# Altium PCB USBtoCANF3.PcbDoc
Units mil, origin at the board's own origin, x right, y up, seen from the top; angles counter-clockwise.
Board outline 1835 x 2600 mil, 2 copper layers (Top Layer, Bottom Layer); 28 components, 94 nets, 194 pads, 20 vias.
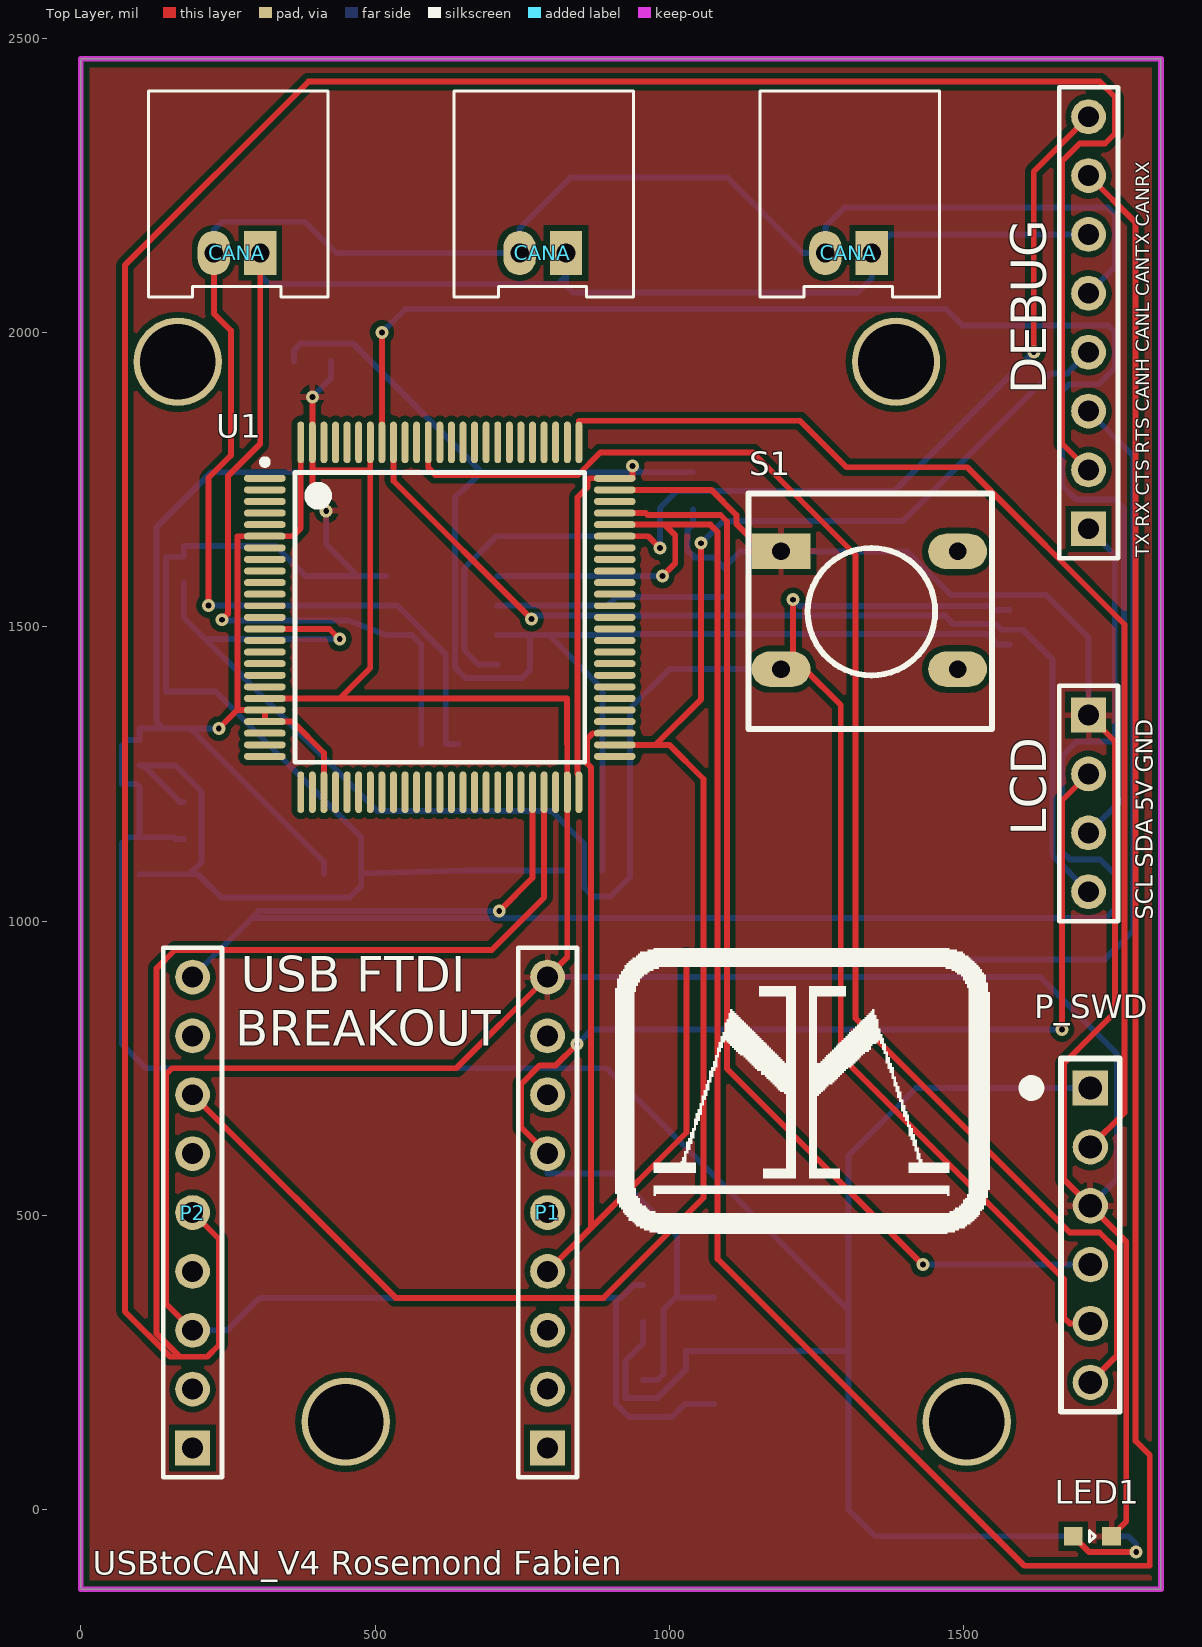
[diagram p0: Top Layer view]
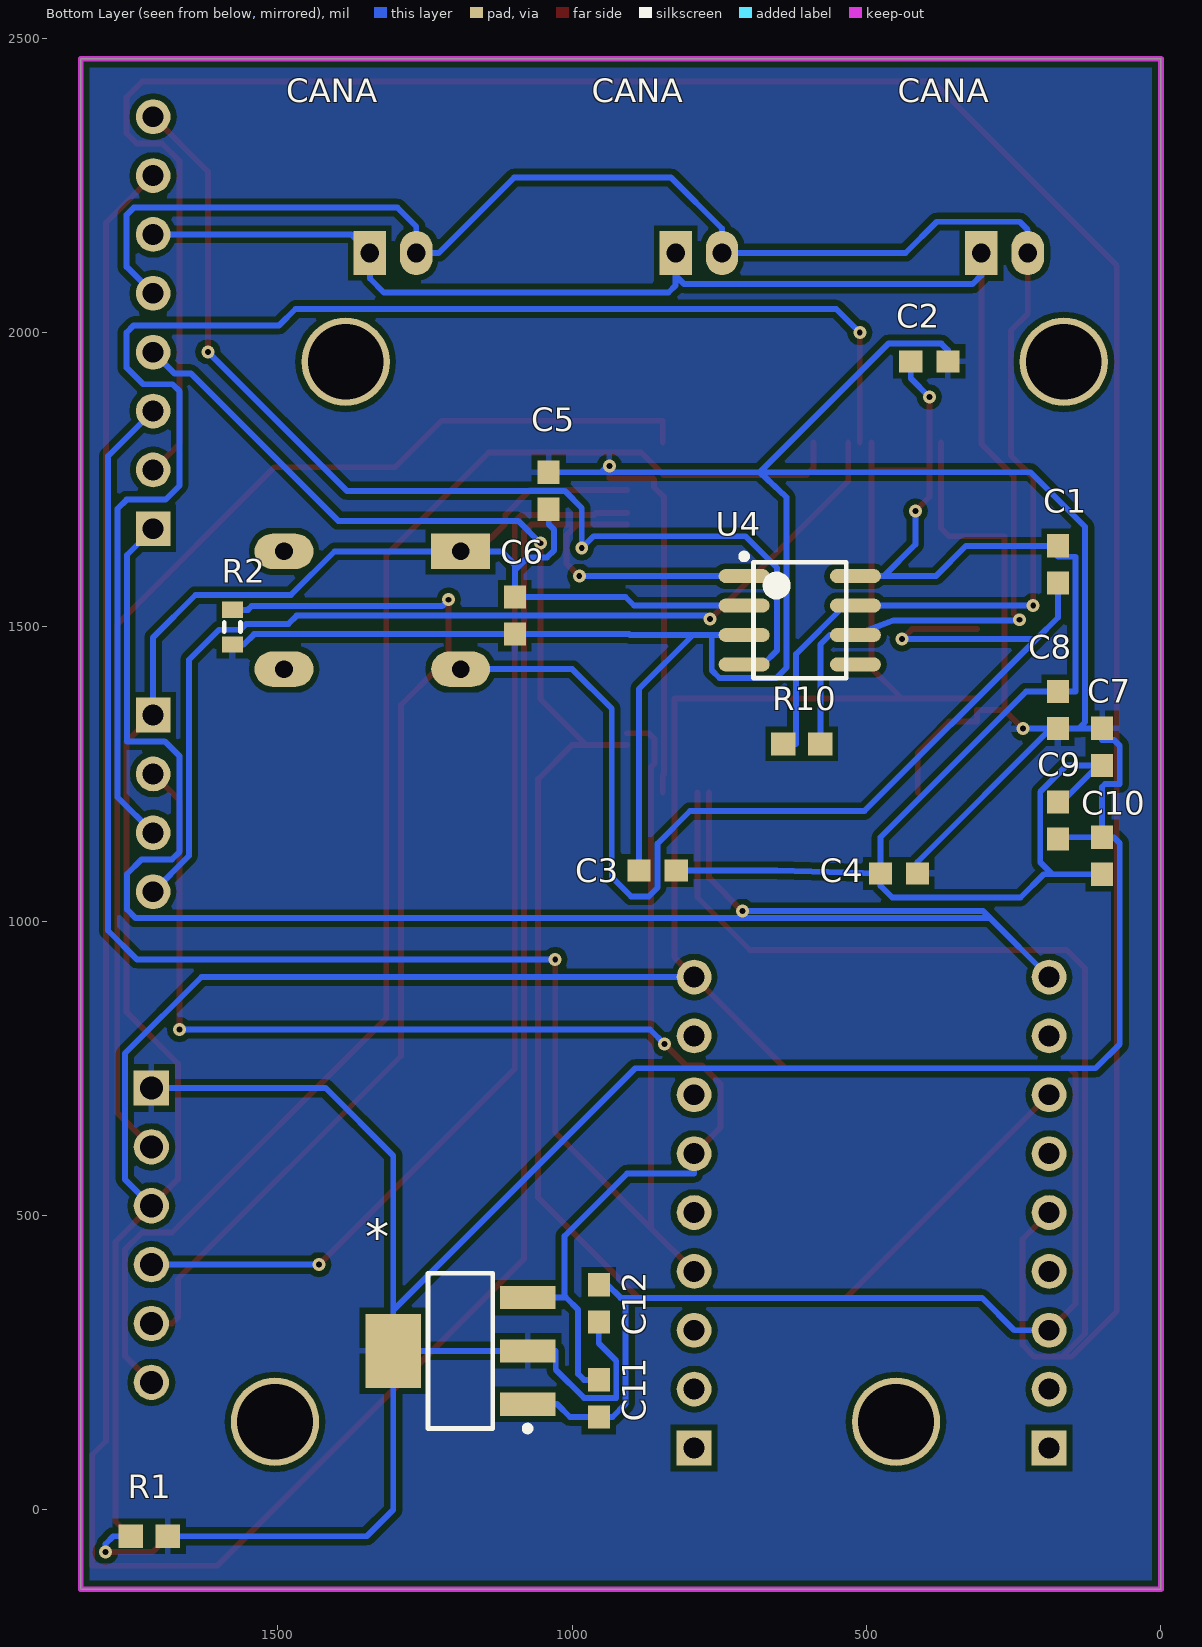
[diagram p1: Bottom Layer view, seen from below]

## Layer stack, top to bottom
Top Solder: solder mask 0.4, Solder Resist, Dk 3.5
Top Layer: signal copper 1.4
Dielectric 1: dielectric 12.6, FR-4, Dk 4.8
Bottom Layer: signal copper 1.4
Bottom Solder: solder mask 0.4, Solder Resist, Dk 3.5

## Board outline
0,-135 1835,-135 1835,2465 0,2465

## Design rules (kind name [scope] priority, off if disabled: settings)
Clearance [All] p1: gap=10 ignorepadtopadclearanceinfootprint=TRUE except(0: Arc-Hole Track-Hole SMDPad-Hole THPad-Hole Via-Hole Fill-Hole Poly-Hole Region-Hole Text-Hole; 6: Track-Track Track-SMDPad SMDPad-SMDPad; 7: Track-Via)
HoleSize [All] p1: absolutevalues=TRUE maxlimit=150 minlimit=10 maxpercent=80.000 minpercent=20.000
MinimumAnnularRing [All] p1: minimumring=7
MinimumSolderMaskSliver [All] p1: minsoldermaskwidth=1
PolygonConnect [All] p1: connectstyle=Relief reliefconductorwidth=10 reliefentries=4 polygonreliefangle="90 Angle" airgapwidth=10
RoutingVias [All] p1: holewidth=10 width=22 viastyle="Through Hole" minholewidth=10 minwidth=22 maxholewidth=100 maxwidth=150
SilkToSolderMaskClearance [IsPad] p1: minsilkscreentomaskgap=5 clearancetoexposedcopper=TRUE
SolderMaskExpansion [All] p1: expansion=4
Width [All] p1: maxlimit=150 minlimit=8 preferedwidth=10
27 further rules are at their usual default settings.

## Components (designator, comment, footprint, x,y, rotation, side; value= is the part's Value field where it differs from the comment)
* "TLV1117LV33DCYR" SOT23-4N 1190,270 r0 bottom
C1 "Cap" CAPC0603 175,1606.06 r90 bottom value=100nF
C2 "Cap" CAPC0603 393.46,1951.06 r0 bottom value=4.7uF
C3 "Cap" CAPC0603 855,1086.06 r180 bottom value=100nF
C4 "Cap" CAPC0603 445,1081.06 r0 bottom value=100nF
C5 "Cap" CAPC0603 1040,1731.06 r270 bottom value=100nF
C6 "Cap" CAPC0603 1097.48,1519.02 r90 bottom value=100nF
C7 "Cap" CAPC0603 100,1296.06 r270 bottom value=1uF
C8 "Cap" CAPC0603 175,1358.58 r90 bottom value=10nF
C9 "Cap" CAPC0603 175,1171.06 r90 bottom value=1uF
C10 "Cap" CAPC0603 100,1111.06 r270 bottom value=10nF
C11 "Cap" CAPC0603 955,189.29 r270 bottom value=1uF
C12 "Cap" CAPC0603 955,350.71 r90 bottom value=1uF
CANA "2-pin Horz Sherlock" MOLEX-HDR-1X2-SHERLOCK-HORZ 824.37,2135 r0 top
CANA "2-pin Horz Sherlock" MOLEX-HDR-1X2-SHERLOCK-HORZ 1343.74,2135 r0 top
CANA "2-pin Horz Sherlock" MOLEX-HDR-1X2-SHERLOCK-HORZ 305,2135 r0 top
LED1 "LED" LED0603 1718.5,-45 r0 top
P1 "Header 9" HDR1X9 793,105 r90 top
P2 "Header 9" HDR1X9 190,105 r90 top locked
P_SWD "SWD" SWD_STM32 1715,716.5 r0 top (schematic designator P_SWD1)
R1 "Res" RES0603 1718.5,-45 r0 bottom value=1k
R2 "Res3" J1-0603 1577.48,1499.33 r90 bottom value=1K
R10 "Res" RES0603 610,1301.06 r0 bottom value=120
S1 "SW-PB" "SW PB" 1189.64,1628.07 r0 top
"SCL SDA 5V GND" "LCD" HDR1X4 1712.01,1350 r270 top (schematic designator P4)
"TX RX CTS RTS CANH CANL CANTX CANRX" "Header 8" HDR1X8 1712.01,1666.5 r90 top (schematic designator P3)
U1 "STM32F303VCT6" STM-LQFP100_N 610,1516.06 r0 top
U4 "SN65HVD230DR" SOIC-8pin 613.5,1511.06 r180 bottom

## Footprints (in the part's own frame and the unit in brackets; to place one, negate y for a bottom-side part, rotate by r counter-clockwise, add the part's x,y. Pads: shape width x height; smd on the part's side, far side on the other; paste and mask are expansions set on the pad)
CAPC0603 [mm] "Chip Capacitor, 2-Leads, Body 1.60x0.80mm, IPC Medium Density"
  rect 1x0.95 smd: 1(-0.8,0) 2(0.8,0)
  body extent -0.88,-0.48 0.87,0.48, height 0.8
HDR1X4 [mm] "Connector; Header; 4 Position"
  rect 1.5x1.5 hole 0.9: 1(0,0)
  round 1.5 hole 0.9: 2(2.54,0) 3(5.08,0) 4(7.62,0)
  silkscreen extent -1.27,-1.27 8.89,1.27
HDR1X8 [mm] "Connector; Header; 8 Position"
  rect 1.5x1.5 hole 0.9: 1(0,0)
  round 1.5 hole 0.9: 2(2.54,0) 3(5.08,0) 4(7.62,0) 5(10.16,0) 6(12.7,0) 7(15.24,0) 8(17.78,0)
  silkscreen extent -1.27,-1.27 19.05,1.27
HDR1X9 [mm] "Connector; Header; 9 Position"
  rect 1.5x1.5 hole 0.9: 1(0,0)
  round 1.5 hole 0.9: 2(2.54,0) 3(5.08,0) 4(7.62,0) 5(10.16,0) 6(12.7,0) 7(15.24,0) 8(17.78,0) 9(20.32,0)
  silkscreen extent -1.27,-1.27 21.59,1.27
J1-0603 [mm] "Chip Resistor, Body 1.6x0.8mm, IPC High Density"
  rect 0.7x0.9 smd: 1(-0.75,0) 2(0.75,0)
  silkscreen extent -0.2,-0.35 0.2,0.35, body extent -0.85,-0.48 0.85,0.48, height 0.9
LED0603 [mm] "Chip LED, 2-Leads, Body 1.60x0.80mm, IPC Medium Density"
  rect 0.8x0.8 smd: A(-0.825,0) C(0.825,0)
  silkscreen extent -0.13,-0.25 0.13,0.25, body extent -0.88,-0.48 0.87,0.47, height 0.8
MOLEX-HDR-1X2-SHERLOCK-HORZ [mm]
  rect 1.397x1.905 hole 0.8: 1(0,0)
  oval 1.397x1.905 hole 0.8: 2(-2,0)
  silkscreen extent -4.83,-1.91 2.92,6.98, body extent -4.83,-1.91 2.87,8.59, height 5.54
RES0603 [mm] "Chip Resistor, 2-Leads, Body 1.60x0.80mm, IPC Medium Density"
  rect 1.05x1 smd: 1(-0.8,0) 2(0.8,0)
  body extent -0.88,-0.48 0.87,0.47, height 0.8
SOIC-8pin [mm] "For 296-1345-1-ND"
  oval 2.2x0.6 smd: 1(-2.4,1.905) 2(-2.4,0.635) 3(-2.4,-0.635) 4(-2.4,-1.905) 5(2.4,-1.905) 6(2.4,-0.635) 7(2.4,0.635) 8(2.4,1.905)
  silkscreen extent -2.53,-2.5 2,2.88, body extent -2,-2.5 2,2.5, height 1.75
SOT23-4N [mm] "SOT223, 4-Leads, Body 6.50x7.00mm (avg), Pitch 2.30mm, IPC Medium Density"
  rect 2.4x1 smd: 1(-2.9,2.3) 2(-2.9,0) 3(-2.9,-2.3)
  rect 2.4x3.2 smd: 4(2.9,0)
  silkscreen extent -3.02,-3.35 1.4,3.47, body extent -1.85,-3.35 1.85,3.35, height 1.7
STM-LQFP100_N [mm] "Thin QFP, 100-Leads, Body 14x14mm, Pitch 0.5mm, IPC Medium Density"
  oval 1.8x0.3 smd: 1(-7.55,6) 2(-7.55,5.5) 3(-7.55,5) 4(-7.55,4.5) 5(-7.55,4) 6(-7.55,3.5) 7(-7.55,3) 8(-7.55,2.5) 9(-7.55,2) 10(-7.55,1.5) 11(-7.55,1) 12(-7.55,0.5) 13(-7.55,0) 14(-7.55,-0.5) 15(-7.55,-1) 16(-7.55,-1.5) 17(-7.55,-2) 18(-7.55,-2.5) 19(-7.55,-3) 20(-7.55,-3.5) 21(-7.55,-4) 22(-7.55,-4.5) 23(-7.55,-5) 24(-7.55,-5.5) 25(-7.55,-6) 51(7.55,-6) 52(7.55,-5.5) 53(7.55,-5) 54(7.55,-4.5) 55(7.55,-4) 56(7.55,-3.5) 57(7.55,-3) 58(7.55,-2.5) 59(7.55,-2) 60(7.55,-1.5) 61(7.55,-1) 62(7.55,-0.5) 63(7.55,0) 64(7.55,0.5) 65(7.55,1) 66(7.55,1.5) 67(7.55,2) 68(7.55,2.5) 69(7.55,3) 70(7.55,3.5) 71(7.55,4) 72(7.55,4.5) 73(7.55,5) 74(7.55,5.5) 75(7.55,6)
  oval 0.3x1.8 smd: 26(-6,-7.55) 27(-5.5,-7.55) 28(-5,-7.55) 29(-4.5,-7.55) 30(-4,-7.55) 31(-3.5,-7.55) 32(-3,-7.55) 33(-2.5,-7.55) 34(-2,-7.55) 35(-1.5,-7.55) 36(-1,-7.55) 37(-0.5,-7.55) 38(0,-7.55) 39(0.5,-7.55) 40(1,-7.55) 41(1.5,-7.55) 42(2,-7.55) 43(2.5,-7.55) 44(3,-7.55) 45(3.5,-7.55) 46(4,-7.55) 47(4.5,-7.55) 48(5,-7.55) 49(5.5,-7.55) 50(6,-7.55) 76(6,7.55) 77(5.5,7.55) 78(5,7.55) 79(4.5,7.55) 80(4,7.55) 81(3.5,7.55) 82(3,7.55) 83(2.5,7.55) 84(2,7.55) 85(1.5,7.55) 86(1,7.55) 87(0.5,7.55) 88(0,7.55) 89(-0.5,7.55) 90(-1,7.55) 91(-1.5,7.55) 92(-2,7.55) 93(-2.5,7.55) 94(-3,7.55) 95(-3.5,7.55) 96(-4,7.55) 97(-4.5,7.55) 98(-5,7.55) 99(-5.5,7.55) 100(-6,7.55)
  silkscreen extent -7.67,-6.25 6.25,6.82, body extent -7,-7 7,7, height 1.6
"SW PB" [mil]
  rect 100x60 hole 30: 1(0,0)
  oval 100x60 hole 30: 2(0,-200) 3(300,-200) 4(300,0)
  silkscreen extent -55,-302 358,98
SWD_STM32 [mil] "SWD connector matching the pinout on STM Discovery Boards"
  rect 60x60 hole 39.37: 1(0,0)
  round 60 hole 39.37: 2(0,-100) 3(0,-200) 4(0,-300) 5(0,-400) 6(0,-500)
  silkscreen extent -110,-550 50,50

## Part data
*: "IC REG LINEAR 3.3V 1A SOT223-4", Digi-Key Part Number=296-28778-1-ND
C1 C2 C3 C4 C5 C6 C7 C8 C9 C10 C11 C12: Supplier Part Number 1=1276-1000-1-ND, Supplier 1=Digi-Key
CANA CANA CANA: library part MOLEX-HDR-1x2-SHERLOCK_RA, "Header, Molex, 2mm Pitch Sherlock Header, Single Row, Horizontal, 2 Circuits, Length 3.3mm,  0353630260", Manufacturer="Molex Inc", Manufacturer Part Number=0353630260, Supplier Part Number 1=WM18931-ND, Supplier 1=Digi-Key
LED1: Color=Red, Supplier Part Number 1=754-1122-1-ND, Supplier 1=Digi-Key
P1 P2: "Header, 9-Pin", LatestRevisionDate=17-Jul-2002, LatestRevisionNote="Re-released for DXP Platform.", Publisher="Altium Limited"
P_SWD: library part SWD_STM32, "SWD connector matching the pinout on STM Discovery Boards"
R1 R10: Supplier Part Number 1=RMCF0603JT10K0CT-ND, Supplier 1=Digi-Key
R2: "Resistor", LatestRevisionDate=29-May-2009, LatestRevisionNote="IPC-7351 Footprint Added.", PackageDescription="Chip Resistor", PackageReference=J1-0603, Published=8-Jun-2000, Publisher="Altium Limited"
S1: "DIGIKEY SW400-ND", LatestRevisionDate=17-Jul-2002, LatestRevisionNote="Re-released for DXP Platform.", Published=24-Mar-1999, Publisher="Altium Limited"
"SCL SDA 5V GND": library part "Header 4", "Header, 4-Pin", LatestRevisionDate=17-Jul-2002, LatestRevisionNote="Re-released for DXP Platform.", Publisher="Altium Limited"
"TX RX CTS RTS CANH CANL CANTX CANRX": "Header, 8-Pin", LatestRevisionDate=17-Jul-2002, LatestRevisionNote="Re-released for DXP Platform.", Publisher="Altium Limited"
U1: "ARM Cortex-M4 32-bit MCU, 256 KB Flash, 40 KB Internal RAM, 87 I/Os, 100-pin LQFP, -40 to 85 degC, Tray", I/Os (High Current)=87, Operating Frequency(F) (Processor speed) (MHz)=72, Supplier Part Number 1=497-13233-ND, Supply Voltage(Vcc) min (V)=2, ComponentLink1Description="Manufacturer URL", ComponentLink1URL=http://www.st.com/web/en/home.html, ComponentLink2Description=Datasheet, ComponentLink2URL=http://www.st.com/st-web-ui/static/active/en/resource/technical/document/datasheet/DM00058181.pdf, ComponentLink3Description="Package Specification", ComponentLink3URL=http://www.st.com/st-web-ui/static/active/en/resource/technical/document/data_brief/DM00071938.pdf, Core="ARM Cortex-M4", D/A Converter="2x12-bit (2 Channel)", DatasheetVersion="Rev. 6", FLASH Size (Prog) (kB)=256, Internal RAM Size (kB)=40, Mounting Technology="Surface Mount", PackageDescription="100-Pin Low Profile Quad Flat Package, 14 x 14 mm Body, 0.5 mm Pitch", PackageReference=LQFP100, PackageVersion="Rev. 1, 06/2013", Packing=Tray, PartNumber=STM32F303VCT6, Supplier 1=Digi-Key, Supplier 2=Farnell, Supplier 3=Newark, Supplier 4=Newark, Supplier 5=Mouser, Supplier Part Number 2=2215110, Supplier Part Number 3=43W6527, Supplier Part Number 4=46W2194, Supplier Part Number 5=511-STM32F303VCT6
U4: "IC TXRX CAN 1MBPS 3.3V 8SOIC", Supplier Part Numbe 1=296-11654-1-ND, Supplier 1=Digi-Key

## Free pads (board coordinates)
  round 150 hole 128.5: 4(165,1950) 4(450,149.38) 4(1385,1950) 4(1505,149.38)

## Via types
v1: diameter 22, hole 10, Top Layer to Bottom Layer, tented both sides, 20 vias

## Nets (pads, with @x,y where several pads share a name; then routed paths per layer and width w, separated by ;. In a path a pad name is that pad's centre, name@x,y a point inside that pad or via, vN(x,y) a via of type N, cw(c..) or ccw(c..) an arc to the next point about the centre after c; other vN are vias at no path point)
3V3: *.2 *.4 C2.1 C3.1 C4.1 C5.1 C6.1 C7.1 C8.1 C9.1 C10.1 C12.1 P_SWD.1 R1.1 R2.1 U1.6 U1.21 U1.22 U1.28 U1.50 U1.75 U1.100 U4.3 | length 9724.6
  Top Layer w10: v1(234.5,1327.09) 266,1358.58 ; U1.100 373.78,1667.64 360,1653.86 U1.6 266,1653.86 266,1358.58 ; U1.28 413.15,1285.75 360,1338.9 U1.22 U1.21 266,1358.58 ; U1.50 846.22,1248 844,1250.22 844,1720 861,1737 861,1750 863.28,1752.28 U1.75 937,1752.28 v1(937,1773)
  Bottom Layer w10: C9.1 161.3,1139.57 158.31,1142.56 C10.1 ; v1(234.5,1327.09) C8.1@187,1327.09 ; C2.1 361.97,1970 372.97,1981 463,1981 681.44,1762.56 ; C4.1 413.5,1100.58 C8.1@187,1327.09 ; U4.3 763,1486.06 ; C3.1 886.5,1394.57 795,1486.06 ; v1(937,1773) 940.56,1773 951,1762.56 ; C12.1 955,282.7 925.3,253 925.3,190.1 980,190.1 1028,238.1 1028,270 *.2 *.4 ; C5.1 951,1762.56 ; R2.1 1558.2,1469.8 1540.48,1487.52 C6.1 903.46,1487.52 902,1486.06 795,1486.06 ; R1.1 1349.17,-45 1304.17,0 *.4 ; P_SWD.1 1419,716.5 1304.17,601.67 1304.17,338.83 ; C10.1 80,1142.56 70,1132.56 70,791 111,750 893,750 1304.17,338.83 ; C10.1 100,1228 95,1233 70,1233 70,1298 80,1308 100,1308 C7.1 137,1327.56 137.47,1327.09 140,1327.09 ; 140,1327.09 C8.1 C8.1@187,1327.09 ; 140,1327.09 129,1338.09 129,1670 221.56,1762.56 681.44,1762.56 ; 681.44,1762.56 937,1762.56 951,1762.56 ; 681.44,1762.56 636,1720 636,1430.68 653.68,1413 750,1413 763,1426 763,1486.06 ; 763,1486.06 795,1486.06 ; *.4 1304.17,338.83
5V: "SCL SDA 5V GND.2" *.3 C11.1 P1.6 | length 2191.9
  Top Layer w10: P1.6 748,650 748,723 780,755 807,755 v1(843,791) ; v1(1667,816) 1667,1204.99 1712.01,1250
  Bottom Layer w10: P1.6 793,571 907,571 1013,465 1013,360.55 ; v1(843,791) 868,816 v1(1667,816) ; C11.1 980,220.79 990,230.79 990,340 1010.55,360.55 1013,360.55 ; *.3 1013,360.55
CAN_RXA: "TX RX CTS RTS CANH CANL CANTX CANRX.8" U1.70 U4.4 | length 1904.2
  Top Layer w10: U1.70 963.86,1653.86 v1(983.86,1633.86) ; v1(1619,1967) 1619,2273.49 1712.01,2366.5
  Bottom Layer w10: U4.4 676,1436.06 652,1460.06 652,1600 705.86,1653.86 963.86,1653.86 v1(983.86,1633.86) 983.86,1701.86 1013,1731 1383,1731 v1(1619,1967)
CAN_TXA: "TX RX CTS RTS CANH CANL CANTX CANRX.7" U1.71 U4.1 | length 5153.4
  Top Layer w10: U1.71 992.23,1673.54 ; v1(988.06,1586.06) 1010,1608 1010,1655.77 992.23,1673.54 ; 1712.01,2266.5 1792,2186.5 1792,117 1816,93 1816,-95 1603,-95 1081.69,426.31 1081.69,1661.39 1069.54,1673.54 992.23,1673.54
  Bottom Layer w10: U4.1 v1(988.06,1586.06)
CANH_A: "TX RX CTS RTS CANH CANL CANTX CANRX.5" CANA.2 R10.2 U4.7 | length 3181.1
  Top Layer w10: v1(217,1536.06) 217,1753 255,1791 255,2003.26 226.26,2032 CANA.2@226.26,2135
  Bottom Layer w10: v1(217,1536.06) U4.7 537.43,1536.06 620,1453.5 620,1301.06 R10.2 ; CANA.2@226.26,2135 226.26,2174.26 240,2188 381,2188 434,2135 745.63,2135 745.63,2176.63 832,2263 1099,2263 1227,2135 1265,2135 1265,2180 1297,2212 1745,2212 1757,2200 1757,2111.49 1712.01,2066.5
CANL_A: "TX RX CTS RTS CANH CANL CANTX CANRX.6" CANA.1 R10.1 U4.6 | length 2752.9
  Top Layer w10: v1(240,1512) 250,1522 250,1756 305,1811 CANA.1@305,2135
  Bottom Layer w10: v1(240,1512) 240,1511 454,1511 U4.6 562.44,1486.06 578.5,1470 R10.1 ; CANA.1@305,2135 305,2097 320,2082 810,2082 824.37,2096.37 ; CANA.1@824.37,2135 824.37,2096.37 ; 1712.01,2166.5 1375.24,2166.5 1343.74,2135 1343.74,2091.74 1320,2068 836.37,2068 824.37,2080 824.37,2096.37
CTS: "TX RX CTS RTS CANH CANL CANTX CANRX.3" P1.4 U1.53 | length 3206.6
  Top Layer w10: P1.4 866.53,478.53 ; U1.53 870,1319.21 860,1309.21 860,1268 866.53,1261.47 866.53,478.53 ; v1(1029,935) 1029,641 866.53,478.53
  Bottom Layer w10: v1(1029,935) 1739.58,935 1788.54,983.96 1788.54,1789.97 1712.01,1866.5
GND: "SCL SDA 5V GND.1" *.1 C1.2 C2.2 C3.2 C4.2 C5.2 C6.2 C7.2 C8.2 C9.2 C10.2 C11.2 C12.2 LED1.C P1.9 P2.3 P_SWD.3 S1.1 U1.20 U1.49 U1.74 U1.94 U1.99 U4.2 U4.8 | length 11129.3
  Top Layer w10: P2.3 145,350 145,740 155,750 638,750 P1.9 826.54,938.54 U1.49 826.27,1378.27 440,1378.27 ; U1.20 440,1378.27 ; v1(393.46,1890.5) U1.99 393.46,1766 ; v1(417,1697) 393.46,1720.54 393.46,1766 ; U1.94 491.89,1766 ; U1.74 1071.18,1732.6 1113.78,1690 1113.78,1675.22 1160.93,1628.07 S1.1 ; 1712.01,1350 1757,1305.01 1757,845.23 1670,758.23 1670,561.5 P_SWD.3 1776,455.5 1776,-19.98 LED1.C ; 393.46,1766 491.89,1766 ; 440,1378.27 491.89,1430.16 491.89,1766
  Bottom Layer w10: C10.2 184.57,1079.57 ; C7.2 C7.2@106,1264.57 ; C9.2 168.01,1202.56 C7.2@106,1264.57 ; P2.3 249,305 304,360 909.3,360 ; v1(393.46,1890.5) 424.96,1922 C2.2 ; v1(417,1697) 417,1640 470.94,1586.06 ; U4.8 470.94,1586.06 ; U4.2 895,1536.06 909.45,1550.51 C6.2 1097.48,1596 ; P1.9 1630,905 1760,775 1760,561.5 P_SWD.3 ; C3.2 652,1086.06 C4.2 ; C12.2 940,382.2 917.8,360 909.3,360 ; C5.2 1040,1674.28 1030.74,1665.02 1030.74,1630 1042.8,1617.94 1075.54,1617.94 1097.48,1596 ; *.1 1025.65,179.45 1004,157.8 C11.2 931.5,157.8 909.3,180 909.3,360 ; 1712.01,1350 1712.01,1481.99 1640,1554 1478,1554 1403.93,1628.07 S1.1 1120,1628.07 1097.48,1605.55 1097.48,1596 ; C7.2@106,1264.57 160,1264.57 205,1219.57 205,1100 184.57,1079.57 ; 184.57,1079.57 199,1079.57 238.57,1040 456.5,1040 476.5,1060 C4.2 ; 470.94,1586.06 382.5,1586.06 331,1637.56 C1.2 175,1619 145,1619 145,1390.08 C8.2 229,1390.08 476.5,1142.58 C4.2
LCD_I2C_SCL: "SCL SDA 5V GND.4" U1.92 | length 1735.4
  Top Layer w10: U1.92 531.26,1747.74 v1(766,1513)
  Bottom Layer w10: v1(766,1513) 772,1519 1468.2,1519 1482.2,1505 1554,1505 1564,1495 1600,1495 1651,1444 1651,1111.01 1712.01,1050
LCD_I2C_SDA: "SCL SDA 5V GND.3" U1.93 | length 2489.3
  Top Layer w10: U1.93 v1(511.57,2000)
  Bottom Layer w10: v1(511.57,2000) 551.57,2040 1470,2040 1498,2012 1745,2012 1757,2000 1757,1940 1729,1912 1679,1912 1667,1900 1667,1740 1691,1716 1757,1716 1772.54,1700.46 1772.54,1210.53 1712.01,1150
NetLED1_A: LED1.A R1.2 | length 180.5
  Top Layer w10: LED1.A 1713.02,-72 v1(1793,-72)
  Bottom Layer w10: R1.2 1780,-45 1793,-58 v1(1793,-72)
NRST: C1.1 P_SWD.5 R2.2 S1.2 U1.14 | length 3869.4
  Top Layer w10: U1.14 422.62,1496.38 v1(440,1479) ; S1.2 S1.2@1210,1428.07 ; v1(1210,1546) S1.2@1210,1428.07 ; P_SWD.5 1680,316.5 1670,326.5 1670,392 1291,771 1291,1367.07 1230,1428.07 S1.2@1210,1428.07
  Bottom Layer w10: C1.1 175,1515.89 211.89,1479 ; v1(440,1479) 211.89,1479 ; S1.2 1000,1428.07 933,1361.07 933,1075 900,1042 870,1042 855,1057 855,1132 800,1187 503.89,1187 211.89,1479 ; v1(1210,1546) 1221,1535 1545,1535 1551.14,1528.86 R2.2
PA0: U1.23
PA1: U1.24
PA2: U1.25
PA3: U1.26
PA4: U1.29
PA5: U1.30
PA6: U1.31
PA7: U1.32
PA8: U1.67
PA9: U1.68
PA10: U1.69
PA13/SWDIO: P_SWD.4 U1.72 | length 1881.2
  Top Layer w10: U1.72 959.77,1693.23 963,1690 1086.67,1690 1097.69,1678.98 1097.69,749.31 v1(1430.5,416.5)
  Bottom Layer w10: v1(1430.5,416.5) P_SWD.4
PA14/SWCLK: P_SWD.2 U1.76 | length 2018.3
  Top Layer w10: U1.76 846.22,1850 1222,1850 1301,1771 1506,1771 1773,1504 1773,674.5 P_SWD.2
PA15: U1.77
PB0: U1.35
PB1: U1.36
PB2: U1.37
PB3/SWO: P_SWD.6 U1.89 | length 2499.4
  Top Layer w10: U1.89 590.32,1770 602.32,1758 844.75,1758 882.75,1796 1142,1796 1316,1622 1316,835 1680,471 1730.5,471 1760,441.5 1760,261.5 P_SWD.6
PB4: U1.90
PB5: U1.91
PB8: U1.95
PB9: U1.96
PB10: "TX RX CTS RTS CANH CANL CANTX CANRX.2" P2.5 U1.47 | length 6320.3
  Top Layer w10: P2.5 235,460 235,280 215,260 168,260 ; U1.47 787.17,1040 698.17,951 160,951 129,920 129,299 168,260 ; 1712.01,1766.5 1667,1811.5 1667,2291 1697,2321 1740,2321 1757,2338 1757,2400 1731,2426 387,2426 75,2114 75,337 152,260 168,260
PB11: U1.48
PB12: U1.51
PB13: "TX RX CTS RTS CANH CANL CANTX CANRX.4" P2.7 U1.52 | length 3134.6
  Top Layer w10: P2.7 535,360 888,360 1058,530 1058,1241.53 1000,1299.53 976.53,1299.53 ; U1.52 976.53,1299.53 ; v1(1054,1642) 1054,1377 976.53,1299.53
  Bottom Layer w10: v1(1054,1642) 1092,1680 1397.5,1680 1648,1930.5 1676.01,1930.5 1712.01,1966.5
PB15: U1.54
PC0: U1.15
PC1: U1.16
PC2: U1.17
PC3: U1.18
PC4: U1.33
PC5: U1.34
PC6: U1.63
PC7: U1.64
PC8: U1.65
PC9: U1.66
PC10: U1.78
PC11: U1.79
PC12: U1.80
PC13: U1.7
PC14: U1.8
PC15: U1.9
PD0: U1.81
PD1: U1.82
PD2: U1.83
PD3: U1.84
PD4: U1.85
PD5: U1.86
PD6: U1.87
PD7: U1.88
PD8: U1.55
PD9: U1.56
PD10: U1.57
PD11: U1.58
PD12: U1.59
PD13: U1.60
PD14: U1.61
PD15: U1.62
PE0: U1.97
PE1: U1.98
PE2: U1.1
PE3: U1.2
PE4: U1.3
PE5: U1.4
PE6: U1.5
PE7: U1.38
PE8: U1.39
PE9: U1.40
PE10: U1.41
PE11: U1.42
PE12: U1.43
PE13: U1.44
PE14: U1.45
PE15: "TX RX CTS RTS CANH CANL CANTX CANRX.1" P2.9 U1.46 | length 3072.2
  Top Layer w10: v1(711,1017) 767.48,1073.48 U1.46
  Bottom Layer w10: P2.9 290,1005 ; v1(711,1017) 302,1017 290,1005 ; 1712.01,1666.5 1756.54,1621.97 1756.54,1305.47 1692.47,1305.47 1667,1280 1667,1118 1680,1105 1731.54,1105 1756.54,1080 1756.54,1020 1741.54,1005 290,1005
PF0: U1.12
PF1: U1.13
PF2: U1.19
PF4: U1.27
PF6: U1.73
PF9: U1.10
PF10: U1.11
pads on no net: P1.1 P1.2 P1.3 P1.5 P1.7 P1.8 P2.1 P2.2 P2.4 P2.6 P2.8 S1.3 S1.4 U4.5

## Polygon pours and split planes (outlines as drawn)
no net on Top Overlay (solid): 0,2465
GND on Top Layer "Top Layer-GND" (solid, pour order 19): 0,2465 1835,2465 1835,-135 0,-135
3V3 on Bottom Layer "Bottom Layer-3V3" (solid, pour order 21): 0,-135 1835,-135 1835,2465 0,2465

## Keep-outs
Keep-Out Layer:
  the board outline again, w10

## Silkscreen, mask and mechanical layers (free items; w line width, h text height)
Top Overlay:
  drawing of 4 lines, arcs and shapes, not listed
  text "DEBUG" at 1640,1895 h60 r90
  text "LCD" at 1640,1145 h60 r90
  text "USB FTDI" at 272.12,880.28 h60
  text "BREAKOUT" at 262.12,788.24 h60
  text "USBtoCAN_V4 Rosemond Fabien" at 20,-110 h40